# EAGLE board SMARTBALL_v3 WIP (EAGLE 9.6.2)
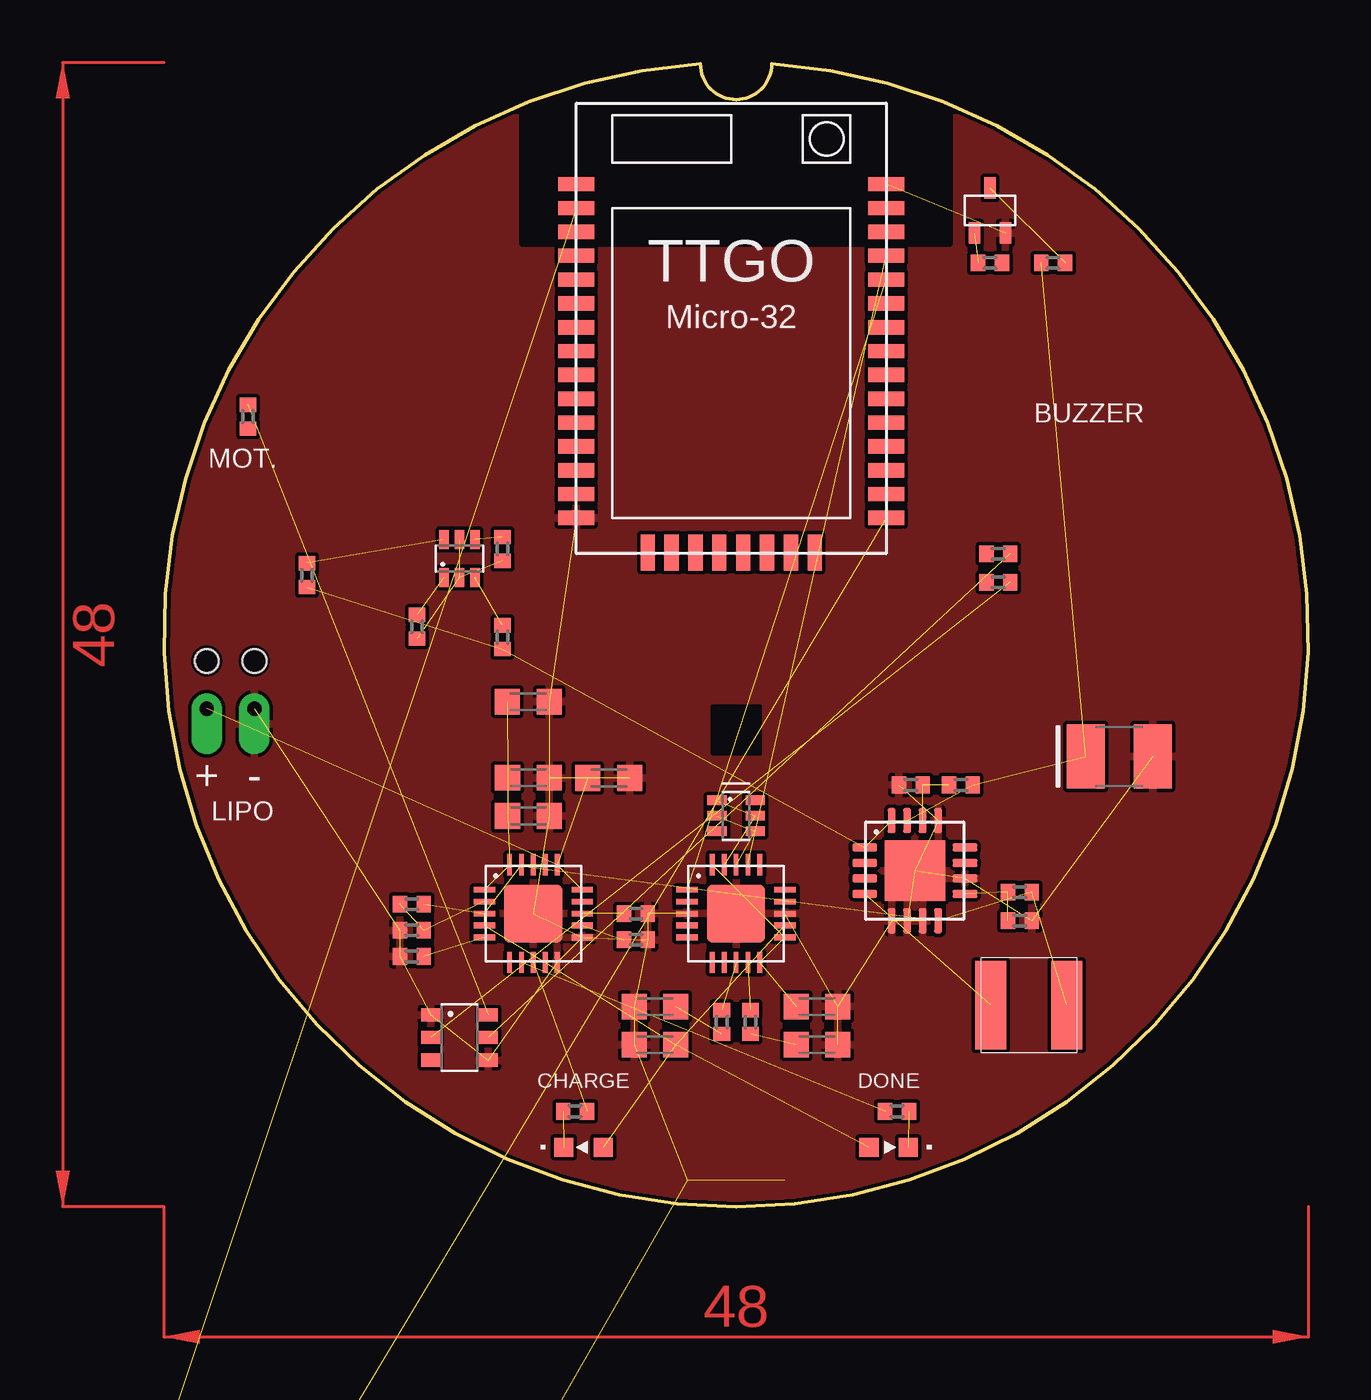
[diagram p0: board, top side]
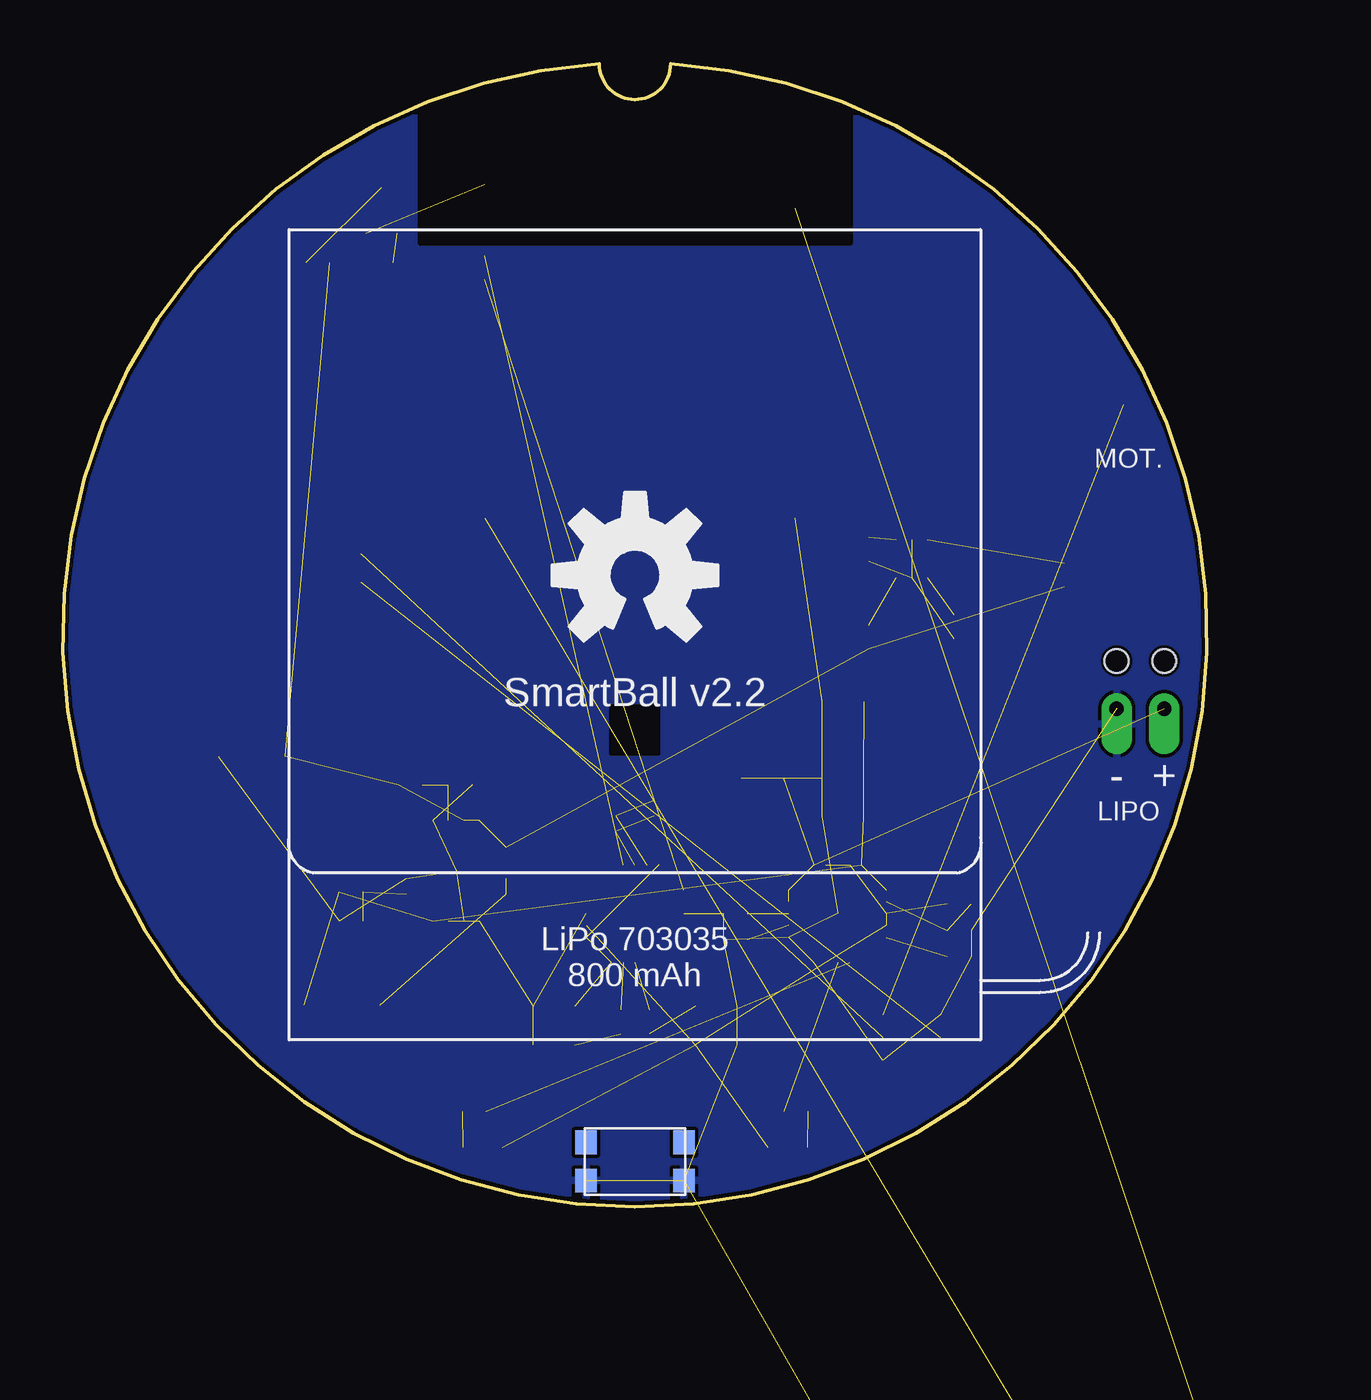
[diagram p1: board, bottom side, seen from below]

Size 47.98 x 47.96 mm. Coordinates in mm from the lower left corner, seen from the top.
Outline: 22.5,47.96 arc353 25.49,47.96 arc-180 22.5,47.96
Copper layers (1*16): Top 0.035mm / dielectric 1.5mm / Bottom 0.035mm
Design rules "PCBWay-LIMIT *": minimum track width 6mil, minimum drill 0.3mm, track to track 6mil, track to pad 6mil, pad to pad 6mil, via to via 6mil, smd to smd 6mil, copper to edge 6mil, drill to drill 6mil, minimum pad ring 7mil, minimum via ring 7mil, stop-mask expansion 4mil, vias tented up to drill 25mil, thermal gap 6mil
Net classes: 0 default: width 0.152 mm; 1 power: width 0.254 mm; 2 +3v3: width 0.203 mm

## Footprints (pad centres in the part's own frame; a part is rotated, then mirrored left to right if it is on the bottom)
SOT457R_PHILIPS = smd 0.55 x 0.8: 1 -0.95,-1.2; 2 0,-1.2; 3 0.95,-1.2; 4 0.95,1.2; 5 0,1.2; 6 -0.95,1.2
C0603 = smd 1.05 x 1.08: 1 -0.875,0; 2 0.875,0
C1210 = smd 1.6 x 2.7: 1 -1.4,0; 2 1.4,0
C0603' = smd 1.1 x 1: 1 -0.85,0; 2 0.85,0
LED_KINGBRIGHT_16X08 = smd 0.8 x 0.8: 1 -0.825,0; 2 0.825,0
QFN20 = smd 0.95 x 0.25: 1 -2.05,1; 2 -2.05,0.5; 3 -2.05,0; 4 -2.05,-0.5; 5 -2.05,-1; 11 2.05,-1; 12 2.05,-0.5; 13 2.05,0; 14 2.05,0.5; 15 2.05,1 | smd 0.25 x 0.9: 6 -1,-2.05; 7 -0.5,-2.05; 8 0,-2.05; 9 0.5,-2.05; 10 1,-2.05; 16 1,2.05; 17 0.5,2.05; 18 0,2.05; 19 -0.5,2.05; 20 -1,2.05 | smd 2.45 x 2.45: EXP 0,0
IND_ASPIAIG-S4035 = smd 1.3 x 3.7: 1 -1.6,0; 2 1.6,0
CONN_WIRES = drill 0.6 pad 1.27 offset: GND 1,0; VCC -1,0 | hole 1: -1,-2; 1,-2
BUT_KMR6 = smd 0.9 x 1: 1 -2.05,0.8; 2 -2.05,-0.8; 3 2.05,-0.8; 4 2.05,0.8
R0402 = smd 0.6 x 0.7: 1 -0.5,0; 2 0.5,0
QFN16 = smd 1.05 x 0.35: 1 -2.1,0.975; 2 -2.1,0.325; 3 -2.1,-0.325; 4 -2.1,-0.975; 9 2.1,-0.975; 10 2.1,-0.325; 11 2.1,0.325; 12 2.1,0.975 | smd 0.35 x 1.05: 5 -0.975,-2.1; 6 -0.325,-2.1; 7 0.325,-2.1; 8 0.975,-2.1; 13 0.975,2.1; 14 0.325,2.1; 15 -0.325,2.1; 16 -0.975,2.1 | smd 2.54 x 2.54: PAD 0,0
ESP-MICRO32 = smd 1.524 x 0.6: 1 -6.5,6.05; 2 -6.5,5.05; 3 -6.5,4.05; 4 -6.5,3.05; 5 -6.5,2.05; 6 -6.5,1.05; 7 -6.5,0.05; 8 -6.5,-0.95; 9 -6.5,-1.95; 10 -6.5,-2.95; 11 -6.5,-3.95; 12 -6.5,-4.95; 13 -6.5,-5.95; 14 -6.5,-6.95; 15 -6.5,-7.95; 24 6.5,-7.95; 25 6.5,-6.95; 26 6.5,-5.95; 27 6.5,-4.95; 28 6.5,-3.95; 29 6.5,-2.95; 30 6.5,-1.95; 31 6.5,-0.95; 32 6.5,0.05; 33 6.5,1.05; 34 6.5,2.05; 35 6.5,3.05; 36 6.5,4.05; 37 6.5,5.05; 38 6.5,6.05 | smd 0.6 x 1.524: 16 -3.5,-9.4; 17 -2.5,-9.4; 18 -1.5,-9.4; 19 -0.5,-9.4; 20 0.5,-9.4; 21 1.5,-9.4; 22 2.5,-9.4; 23 3.5,-9.4
SOT363 = smd 0.4 x 0.8: 1 -0.65,-0.8; 2 0,-0.8; 3 0.65,-0.8; 4 0.65,0.8; 5 0,0.8; 6 -0.65,0.8
SOT323 = smd 0.5 x 0.9: 1 -0.65,-0.95; 2 0.65,-0.95; 3 0,0.95

## Placement (x,y rotation side)
BC817DS  SOT_BC817DS  [SOT457R_PHILIPS]  12.39,7.11 270 top
C2  10uF  [C0603]  15.28,21.2 0 top
C4  10uF  [C0603]  20.59,6.81 180 top
C5  47p  [C0603]  20.59,8.41 180 top
C6  10uF  [C0603]  15.28,16.41 0 top
C8  47p  [C0603]  27.39,6.81 0 top
C9  100n  [C0603]  15.28,18.01 0 top
C10  100uF  [C1210]  40.06,18.9 0 top
C11  10uF  [C0603]  18.66,18 0 top
C16  100n  [C0603]  27.39,8.41 0 top
C19  10uF  [C0603']  -5.76,-29.7 0 top  (outside the outline)
C20  100n  [C0603']  -0.19,-29.7 0 top  (outside the outline)
CHARGE  LED_KINGBRIGHT_16X08  [LED_KINGBRIGHT_16X08]  17.59,2.51 180 top
D3  Blue  [LED_KINGBRIGHT_16X08]  -5.94,-33.13 0 top  (outside the outline)
DONE  LED_KINGBRIGHT_16X08  [LED_KINGBRIGHT_16X08]  30.39,2.51 0 top
FT231XQ  QFN_FT231X  [QFN20]  23.99,12.31 0 top
L1  6.8uH  [IND_ASPIAIG-S4035]  36.27,8.47 180 top
LIPO  CONN_BATTERY  [CONN_WIRES]  2.79,20.91 180 bottom
LOGO1  LOGO_OSHWL  [LOGO_OSHW]  23.99,26.51 0 bottom
ON/OFF  BUT_KMR6  [BUT_KMR6]  23.99,1.91 180 bottom
R1  3K16  [R0402]  4.79,-29.7 0 top  (outside the outline)
R3  1.8M  [R0402]  33.42,17.71 0 top
R4  200K  [R0402]  31.32,17.71 0 top
R5  270K  [R0402]  10.39,12.71 0 top
R6  390K  [R0402]  35.89,12.01 180 top
R7  1.8M  [R0402]  35.89,13.21 0 top
R8  100K  [R0402]  10.39,11.61 180 top
R9  6K34  [R0402]  17.24,4.01 180 top
R12  27  [R0402]  24.59,7.76 90 top
R14  3K16  [R0402]  30.74,4.01 0 top
R15  27  [R0402]  23.39,7.76 90 top
R16  2K5  [R0402]  19.79,12.31 180 top
R17  100K  [R0402]  19.79,11.21 180 top
R18  10k  [R0402]  10.61,24.35 270 top
R19  10k  [R0402]  14.19,27.61 270 top
R20  10k  [R0402]  5.99,26.51 270 top
R27  10k  [R0402]  14.19,23.91 270 top
R28  2k  [R0402]  34.64,39.61 0 top
R39  1k  [R0402]  37.29,39.61 180 top
R40  2k  [R0402]  34.99,26.21 180 top
R41  2k  [R0402]  34.99,27.41 180 top
R42  10  [R0402]  3.52,33.16 270 top
THERM  15K  [R0402]  10.39,10.51 0 top
TPS61090  TPS61090RSAR  [QFN16]  31.49,14.11 0 top
U1  [QFN20]  15.49,12.31 0 top
U6  ESP-MICRO32  [ESP-MICRO32]  23.79,36.86 0 top
U$22  SOT_2N7002PS  [SOT363]  12.39,27.21 0 top
U$28  SOT_SBC847AWT1G  [SOT323]  34.64,41.81 0 top
U$29  BATT_BODY  [BATT_BODY]  23.99,24.01 0 bottom
UMH3N  SOT_UMH3N  [SOT363]  23.99,16.41 270 top

## Library data of the parts
BC817DS C10 CHARGE D3 DONE FT231XQ L1 LIPO LOGO1 ON/OFF TPS61090 U1 U$22 U$28 U$29 UMH3N = Smartball
C2 C4-C6 C8 C9 C11 C16 = Smartball; SPICEPREFIX: C
C19 C20 = Maestro
R1 R3-R9 R12 R14-R20 R27 R28 R39-R42 THERM = Smartball; SPICEPREFIX: R
U6 = myComponents

## Nets
+3V3 [+3v3]: R18.2 R19.2 U$22.2 U$22.5
+3V3_SYS [power]: C19.1 C20.1 U6.2
+5V [power]: C10.1 R3.2 R20.2 R27.2 R39.2 TPS61090.1 TPS61090.15 TPS61090.16
B1: BC817DS.5 R41.1
B2: BC817DS.2 R40.1
B3: R28.1 U$28.1
BOOST_EN [power]: TPS61090.11
C1: BC817DS.3
C2: BC817DS.6 R42.1
C3: R39.1 U$28.3
CI: R27.1 U$22.3
D1: R41.2
D2: R40.2
D3: UMH3N.3
D8: R28.2
DI: R20.1 U$22.6
DTR: FT231XQ.18 UMH3N.2 UMH3N.4
FB: R3.1 R4.2 TPS61090.14
GND [power]: BC817DS.1 BC817DS.4 C2.2 C4.2 C5.2 C6.2 C8.2 C9.2 C10.2 C11.2 C16.2 C19.2 C20.2 FT231XQ.3 FT231XQ.13 FT231XQ.EXP LIPO.GND ON/OFF.1 ON/OFF.4 R1.1 R4.1 R6.1 R8.2 R16.1 R17.1 THERM.1 TPS61090.5 TPS61090.6 TPS61090.7 TPS61090.10 TPS61090.13 TPS61090.PAD U1.10 U1.11 U1.EXP U6.1 U6.15 U6.38 U$28.2
LBI: R6.2 R7.1 TPS61090.9
LED: D3.1 U6.24
LED1: DONE.2 R14.2
LED2: CHARGE.2 R9.2
LED3: D3.2 R1.2
MOT: R42.2
PROG1: R16.2 U1.13
PROG3: R17.2 U1.12
RST: UMH3N.6
RTS: FT231XQ.19 UMH3N.1 UMH3N.5
RX: FT231XQ.1 U6.34
SCLK: R19.1 U$22.4
STAT1: R9.1 U1.8
STAT2: R14.1 U1.7
SW: L1.2 TPS61090.3 TPS61090.4
THERM: THERM.2 U1.5
TX: FT231XQ.17 U6.35
USB+: C5.1 R15.1
USB-: C8.1 R12.1
USBDM: FT231XQ.9 R12.2
USBDP: FT231XQ.8 R15.2
VBAT [power]: C11.1 LIPO.VCC U1.14 U1.15 U1.16
VCCIO1: C16.1 FT231XQ.10 FT231XQ.11 FT231XQ.20
VIN [power]: C2.1 C6.1 C9.1 L1.1 R7.2 TPS61090.8 U1.1 U1.20
VPCC: R5.1 R8.1 U1.2
VUSB [power]: C4.1 CHARGE.1 DONE.1 FT231XQ.12 R5.2 U1.3 U1.4 U1.9 U1.17 U1.18 U1.19
Y0: R18.1 U$22.1

## Tracks (layer width: path | path; a pad name or v marks a point on that pad's centre or on a via)
+3V3  (3 unrouted)
+3V3_SYS  (2 unrouted)
+5V  (7 unrouted)
B1  (1 unrouted)
B2  (1 unrouted)
B3  (1 unrouted)
C2  (1 unrouted)
C3  (1 unrouted)
CI  (1 unrouted)
DI  (1 unrouted)
DTR  (2 unrouted)
FB  (2 unrouted)
GND  (34 unrouted)
  pour Top: -0.01,0.01 47.99,0.01 47.99,48.01 -0.01,48.01
  pour Bottom: -0.01,48.01 -0.01,0.01 47.99,0.01 47.99,48.01
LBI  (2 unrouted)
LED  (1 unrouted)
LED1  (1 unrouted)
LED2  (1 unrouted)
LED3  (1 unrouted)
NOGND
  cutout Bottom: 22.99,21.01 22.99,19.01 25,19.01 25,21.01
  cutout Top: 14.99,48.01 14.99,40.4 32.99,40.4 32.99,48.01
  cutout Bottom: 14.97,48.01 14.97,40.43 32.99,40.43 32.99,48.01
  cutout Top: 22.99,21.02 22.99,19 25,19 25,21.02
PROG1  (1 unrouted)
PROG3  (1 unrouted)
RTS  (2 unrouted)
RX  (1 unrouted)
SCLK  (1 unrouted)
STAT1  (1 unrouted)
STAT2  (1 unrouted)
SW  (2 unrouted)
THERM  (1 unrouted)
TX  (1 unrouted)
USB+  (1 unrouted)
USB-  (1 unrouted)
USBDM  (1 unrouted)
USBDP  (1 unrouted)
VBAT  (4 unrouted)
VCCIO1  (3 unrouted)
VIN  (7 unrouted)
VPCC  (2 unrouted)
VUSB  (10 unrouted)
Y0  (1 unrouted)
(copper drawn outside any net)
  shapes: Top area x2

## Text on the board
tPlace: BUZZER | MOT. | LIPO
bPlace: MOT. | SmartBall v2.2 | LIPO
tNames: CHARGE | DONE
tDocu: SPECIFICATIONS ----------------------- / / FR-4 / TG 130-140 / 1.2 mm thickness (1 mm possible) / 6 mil width with 6 mil clearance / 0.3 mm vias / White mask / Back Silkscreen / 1 oz Cu (1 oz Cu possible) / / TRACE WIDTH -------------------------- / / 10 mil : GND,Vin,Vshare,Vusb, +5V / 08 mil : +3.3V / 06 mil : others